# Altium PCB PCB_MS4525DO可移动板.pcbdoc
Units mil, origin at the board's own origin, x right, y up, seen from the top; angles counter-clockwise.
Board outline 2530 x 2292.04 mil, 2 copper layers (Top Layer, Bottom Layer); 3 components, 5 nets, 16 pads, 0 vias.
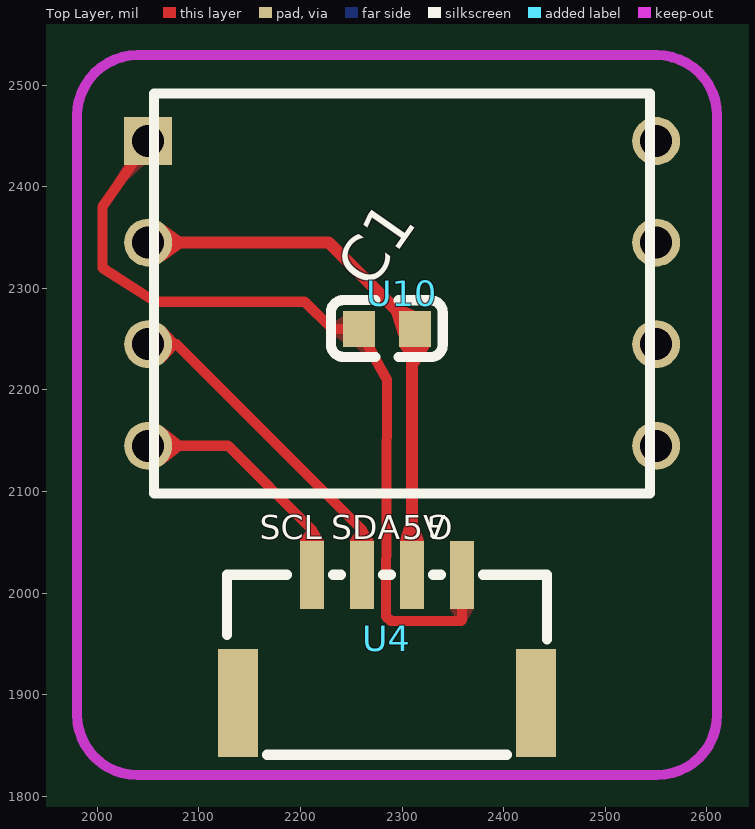
[diagram p0: Top Layer view]
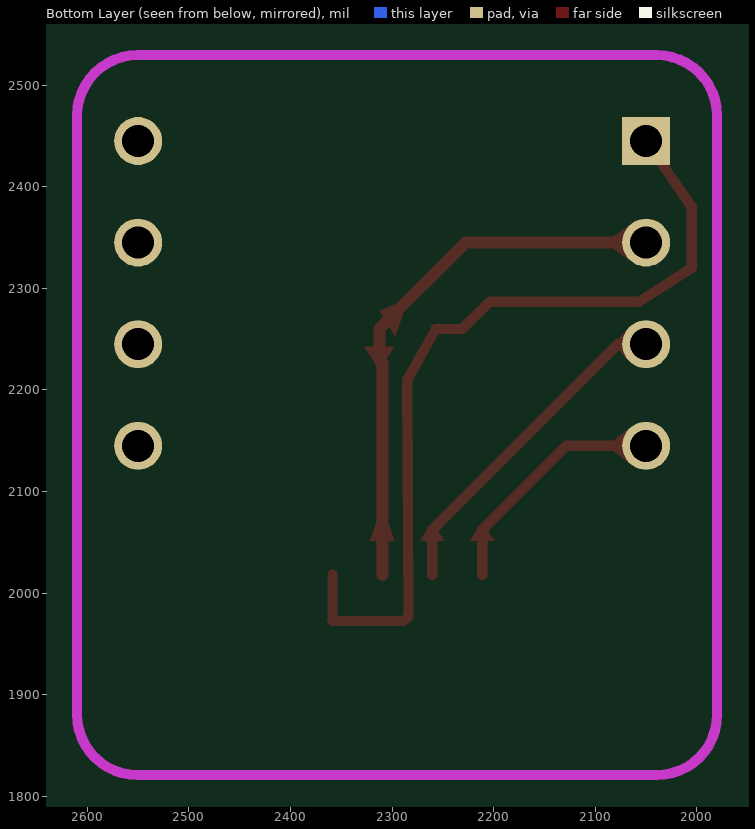
[diagram p1: Bottom Layer view, seen from below]

## Layer stack, top to bottom
Top Layer: signal copper (thickness not stored)
Dielectric: dielectric 12.6, FR-4, Dk 4.8
Bottom Layer: signal copper (thickness not stored)

## Board outline
3530,1000 1000,1000 1000,3292.04 3530,3292.04

## Components (designator, comment, footprint, x,y, rotation, side; value= is the part's Value field where it differs from the comment)
C1 "100nF" C0603 2285,2260 r0 top
U4 "GH1.25-4PWBPZ" CONN-SMD_GH1.25-4PWBPZ 2285,1955 r180 top
U10 "4525DO" 4525DO-DS5AI00DP 2300,2295 r180 top

## Footprints (in the part's own frame and the unit in brackets; to place one, negate y for a bottom-side part, rotate by r counter-clockwise, add the part's x,y. Pads: shape width x height; smd on the part's side, far side on the other; paste and mask are expansions set on the pad)
4525DO-DS5AI00DP [mil]
  rect 47.24x47.24 hole 31.5 paste+0 mask+4: 1(250,-150)
  round 47.24 hole 31.5 paste+0 mask+4: 2(250,-50) 3(250,50) 4(250,150) 5(-250,150) 6(-250,50) 7(-250,-50) 8(-250,-150)
  silkscreen extent -244,-197 244,197
C0603 [mm]
  rect 0.8x0.9 smd paste+0 mask+0.102: 1(-0.7,0) 2(0.7,0)
  silkscreen extent -1.4,-0.7 1.4,0.72
CONN-SMD_GH1.25-4PWBPZ [mm]
  rect 0.6x1.7 smd paste+0 mask+0.05: 1(-1.875,-1.601) 2(-0.625,-1.601) 3(0.625,-1.601) 4(1.875,-1.601)
  rect 1x2.7 smd paste+0 mask+0.05: 5(-3.725,1.601) 6(3.725,1.601)
  silkscreen extent -4,-1.6 4,2.9

## Nets (pads, with @x,y where several pads share a name; then routed paths per layer and width w, separated by ;. In a path a pad name is that pad's centre, name@x,y a point inside that pad or via, vN(x,y) a via of type N, cw(c..) or ccw(c..) an arc to the next point about the centre after c; other vN are vias at no path point)
+5V: C1.2 U4.2 U10.2 | length 541.1
  Top Layer w11.81: U10.2 2227.6,2345 C1.2 2312.6,2229.3 2309.6,2226.3 U4.2
GND: C1.1 U4.1 U10.1 | length 824.5
  Top Layer w10: U10.1 2005,2380 2005,2320 2057,2286.7 2204,2286.7 2231,2260 ; 2230.7,2260 C1.1 ; C1.1@2257,2260 2285,2210 2284,1976.85 2289,1972.44 2358,1972.44 2359,1973.57 ; 2358.8,1973.6 U4.1
S$68: 
SCL: U4.4 U10.4 | length 239.9
  Top Layer w10: U10.4 2128.67,2145 2211.19,2062.48 U4.4
SDA: U4.3 U10.3 | length 330.5
  Top Layer w10: U10.3 2077.88,2245 2260.4,2062.48 U4.3
pads on no net: U4.5 U4.6 U10.5 U10.6 U10.7 U10.8

## Polygon pours and split planes (outlines as drawn)
GND on Bottom Layer (solid): 1500,2655 2945,2655 2985,2695 2985,1780 2705,1500 1675,1500 1635,1540
GND on Top Layer (solid): 1690,2615 3020,2615 3030,2625 3030,1880 2660,1510 1920,1510 1720,1710

## Keep-outs
Keep-Out Layer:
  lines w10: 1980.08,1880.32 ccw(c2039.57,1880.32) 2039.57,1820.83 ; 1980.08,2470 cw(c2039.57,2470) 2039.57,2529.49 ; 2550.51,1820.83 ccw(c2550.51,1880.32) 2610,1880.32 ; 2550.51,2529.49 cw(c2550.51,2470) 2610,2470

## Other copper
Top Layer:
  region net SCL: 2199.38,2051.48 2223,2051.48 2216.19,2062.48 2206.19,2062.48
  region net SDA: 2248.58,2051.48 2272.21,2051.48 2265.4,2062.48 2255.4,2062.48
  region net +5V: 2297.8,2051.48 2321.42,2051.48 2315.51,2069.2 2303.7,2069.2
  region net +5V: 2296.81,2252.6 2312.33,2277.72 2295.97,2284.94 2289.59,2274.61
  region net +5V: 2327.32,2242.28 2297.79,2242.28 2306.65,2229.26 2318.46,2229.26
  region net SCL: 2065.63,2127.28 2065.62,2162.72 2082.16,2150 2082.16,2140
  region net SDA: 2065.62,2227.29 2065.62,2262.72 2077.88,2250 2077.88,2240
  region net +5V: 2065.62,2327.29 2065.62,2362.72 2082.16,2350.9 2082.16,2339.09

## Silkscreen, mask and mechanical layers (free items; w line width, h text height)
Top Overlay:
  text "G" at 2350,2076.81 h23.62 r180
  text "SCL" at 2160,2053.19 h23.62
  text "SDA" at 2230,2053.19 h23.62
  text "5V" at 2300,2053.19 h23.62

## Text inside footprints (layer, text, board x,y; h text height)
U10: Document "7.2 mm height" at 2469.56,2468.23 h31.5 r179